# Altium PCB PCB1.PcbDoc
Units mm, origin at the board's own origin, x right, y up, seen from the top; angles counter-clockwise.
Board outline 85.98 x 15 mm, 2 copper layers (Top Layer, Bottom Layer); 48 components, 48 nets, 104 pads, 9 vias.
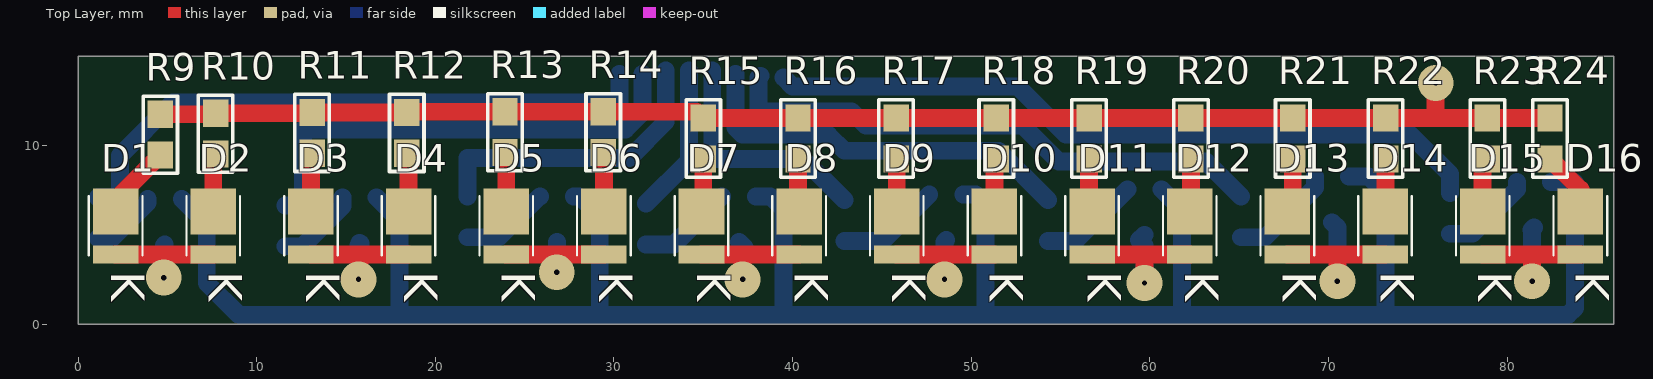
[diagram p0: Top Layer view]
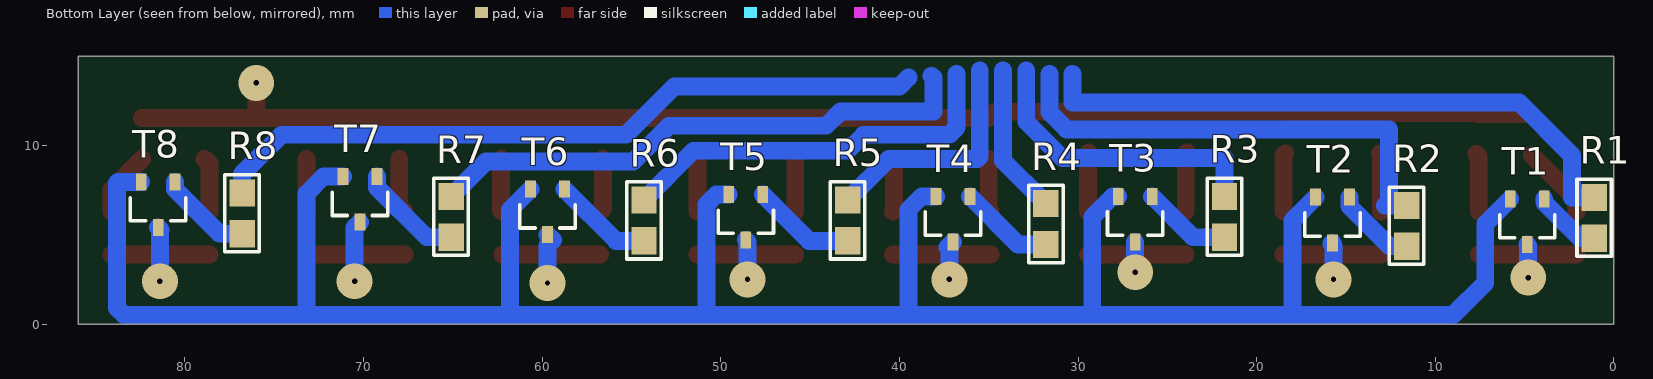
[diagram p1: Bottom Layer view, seen from below]
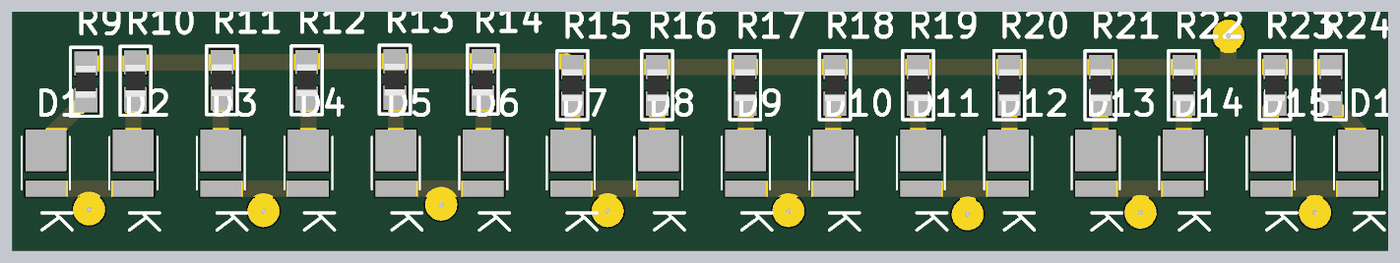
[diagram p2: 3D render of the assembled board from above, using the file's embedded part models]
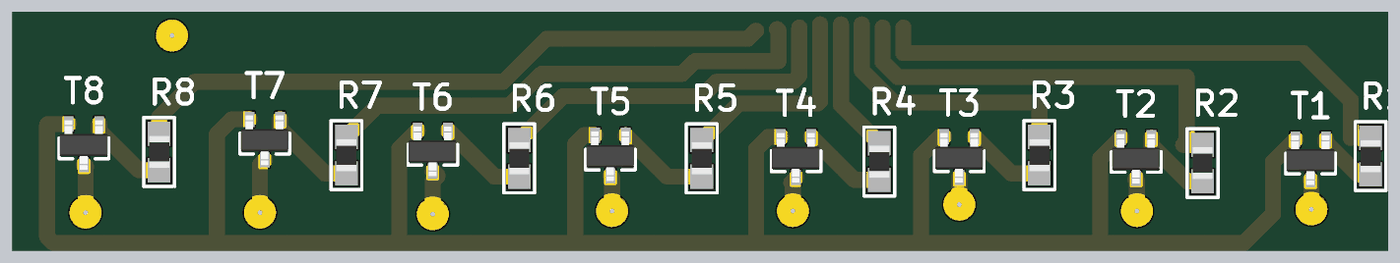
[diagram p3: 3D render of the assembled board from below, using the file's embedded part models]

## Layer stack, top to bottom
Top Solder: solder mask 0.0102, Solder Resist, Dk 3.5
Top Layer: signal copper 0.0356
Dielectric 1: dielectric 0.32, FR-4, Dk 4.8
Bottom Layer: signal copper 0.0356
Bottom Solder: solder mask 0.0102, Solder Resist, Dk 3.5

## Board outline
0,0 85.979,0 85.979,14.986 0.014,14.986 0,15

## Design rules (kind name [scope] priority, off if disabled: settings)
Clearance [All] p1: gap=0.3 ignorepadtopadclearanceinfootprint=FALSE
PolygonConnect [All] p1: connectstyle=Relief reliefconductorwidth=0.254 reliefentries=4 polygonreliefangle="90 Angle" airgapwidth=0.254
RoutingVias [All] p1: holewidth=0.711 width=1.27 viastyle="Through Hole" minholewidth=0.711 minwidth=1.27 maxholewidth=0.711 maxwidth=1.27
SolderMaskExpansion [All] p1: expansion=0.102
Width [All] p1: maxlimit=1 minlimit=0.5 preferedwidth=1
30 further rules are at their usual default settings.

## Components (designator, comment, footprint, x,y, rotation, side; value= is the part's Value field where it differs from the comment)
D1 "LED" *LED_OF-SMD2835Y 2.1,5.5 r270 top
D2 "LED" *LED_OF-SMD2835Y 7.567,5.5 r270 top
D3 "LED" *LED_OF-SMD2835Y 13.033,5.5 r270 top
D4 "LED" *LED_OF-SMD2835Y 18.5,5.5 r270 top
D5 "LED" *LED_OF-SMD2835Y 23.967,5.5 r270 top
D6 "LED" *LED_OF-SMD2835Y 29.433,5.5 r270 top
D7 "LED" *LED_OF-SMD2835Y 34.9,5.5 r270 top
D8 "LED" *LED_OF-SMD2835Y 40.367,5.5 r270 top
D9 "LED" *LED_OF-SMD2835Y 45.833,5.5 r270 top
D10 "LED" *LED_OF-SMD2835Y 51.3,5.5 r270 top
D11 "LED" *LED_OF-SMD2835Y 56.767,5.5 r270 top
D12 "LED" *LED_OF-SMD2835Y 62.233,5.5 r270 top
D13 "LED" *LED_OF-SMD2835Y 67.7,5.5 r270 top
D14 "LED" *LED_OF-SMD2835Y 73.167,5.5 r270 top
D15 "LED" *LED_OF-SMD2835Y 78.633,5.5 r270 top
D16 "LED" *LED_OF-SMD2835Y 84.1,5.5 r270 top
R1 "100" 0805 1.1,5.943 r270 bottom
R2 "100" 0805 11.6,5.5 r270 bottom
R3 "100" 0805 21.8,6 r270 bottom
R4 "100" 0805 31.8,5.6 r270 bottom
R5 "100" 0805 42.9,5.8 r270 bottom
R6 "100" 0805 54.3,5.8 r270 bottom
R7 "100" 0805 65.1,6 r270 bottom
R8 "100" 0805 76.8,6.2 r270 bottom
R9 "68" 0805 4.6,10.6 r90 top
R10 "68" 0805 7.7,10.657 r90 top
R11 "68" 0805 13.1,10.7 r90 top
R12 "68" 0805 18.4,10.7 r90 top
R13 "68" 0805 23.9,10.743 r90 top
R14 "68" 0805 29.4,10.743 r90 top
R15 "68" 0805 35,10.388 r90 top
R16 "68" 0805 40.3,10.388 r90 top
R17 "68" 0805 45.8,10.388 r90 top
R18 "68" 0805 51.4,10.388 r90 top
R19 "68" 0805 56.6,10.388 r90 top
R20 "68" 0805 62.3,10.388 r90 top
R21 "68" 0805 68,10.388 r90 top
R22 "68" 0805 73.2,10.388 r90 top
R23 "68" 0805 78.9,10.388 r90 top
R24 "68" 0805 82.4,10.388 r90 top
T1 "BC817-25" SOT23 3.9,7 r0 bottom
T2 "BC817-25" SOT23 14.8,7.1 r0 bottom
T3 "BC817-25" SOT23 25.85,7.15 r0 bottom
T4 "BC817-25" SOT23 36.05,7.15 r0 bottom
T5 "BC817-25" SOT23 47.65,7.25 r0 bottom
T6 "BC817-25" SOT23 58.75,7.55 r0 bottom
T7 "BC817-25" SOT23 69.25,8.25 r0 bottom
T8 "BC817-25" SOT23 80.55,7.95 r0 bottom

## Footprints (in the part's own frame and the unit in brackets; to place one, negate y for a bottom-side part, rotate by r counter-clockwise, add the part's x,y. Pads: shape width x height; smd on the part's side, far side on the other; paste and mask are expansions set on the pad)
0805 [mil] "Pasivo 0805"
  rect 60x56 smd: 1(-45,0) 2(45,0)
  silkscreen extent -85,-38 85,38, body extent -40,-25 39,25, height 15
*LED_OF-SMD2835Y [mm]
  rect 2.6x2.55 smd: 1(-0.8,0)
  rect 1x2.55 smd: 2(1.6,0)
  silkscreen extent -1.65,-1.5 1.65,1.5
SOT23 [mm]
  rect 0.6x0.95 smd: 1(0,0) 2(0.95,2.55) 3(1.9,0)
  silkscreen extent -0.6,0.87 2.5,2.17, body extent -0.53,-0.25 2.47,2.88, height 1

## Part data
R1 R2 R3 R4 R5 R6 R7 R8 R9 R10 R11 R12 R13 R14 R15 R16 R17 R18 R19 R20 R21 R22 R23 R24: library part RES
T1 T2 T3 T4 T5 T6 T7 T8: library part "TRANSISTOR NPN"

## Via types
v1: diameter 2, hole 0.3, Top Layer to Bottom Layer, 9 vias

## Nets (pads, with @x,y where several pads share a name; then routed paths per layer and width w, separated by ;. In a path a pad name is that pad's centre, name@x,y a point inside that pad or via, vN(x,y) a via of type N, cw(c..) or ccw(c..) an arc to the next point about the centre after c; other vN are vias at no path point)
clockL: 
clockSR: 
dataIn: 
GND: T1.3 T2.3 T3.3 T4.3 T5.3 T6.3 T7.3 T8.3 | length 138.1
  Bottom Layer w1: T1.3 7.2,5.6 7.2,2.3 9,0.5 18.2,0.5 ; T2.3 18,5.8 18,0.7 18.2,0.5 ; T3.3 28.05,7.15 29.2,6 29.2,0.5 ; T4.3 38.75,7.15 39.5,6.4 39.5,0.5 ; T5.3 50.25,7.25 50.8,6.7 50.8,0.5 ; T6.3 61.8,6.4 61.8,0.6 61.9,0.5 ; T7.3 72.25,8.25 73.2,7.3 73.2,0.5 ; T8.3 83.75,7.95 83.8,7.9 83.8,0.9 83.4,0.5 73.2,0.5 ; 18.2,0.5 29.2,0.5 ; 29.2,0.5 39.5,0.5 ; 39.5,0.5 50.8,0.5 ; 50.8,0.5 61.9,0.5 ; 61.9,0.5 73.2,0.5
NetD1_1: D1.1 R9.1 | length 4.2
  Top Layer w1: D1.1 2.1,6.957 R9.1
NetD1_2: D1.2 D2.2 T1.2 | length 8.7
  Top Layer w1: D1.2 4.833,3.9 ; v1(4.8,2.6) 4.8,3.867 4.833,3.9 ; D2.2 4.833,3.9
  Bottom Layer w1: v1(4.8,2.6) 4.8,4.4 T1.2
NetD2_1: D2.1 R10.1 | length 3.3
  Top Layer w1: D2.1 7.567,9.381 R10.1
NetD3_1: D3.1 R11.1 | length 3.3
  Top Layer w1: D3.1 13.033,9.49 R11.1
NetD3_2: D3.2 D4.2 T2.2 | length 8.9
  Top Layer w1: D3.2 15.767,3.9 ; v1@15.767,2.6 15.767,3.9 ; D4.2 15.767,3.9
  Bottom Layer w1: v1(15.7,2.5) 15.7,4.4 15.8,4.5 T2.2
NetD4_1: D4.1 R12.1 | length 3.3
  Top Layer w1: R12.1 18.5,9.457 D4.1
NetD5_1: D5.1 R13.1 | length 3.3
  Top Layer w1: R13.1 23.967,9.533 D5.1
NetD5_2: D5.2 D6.2 T3.2 | length 8.2
  Top Layer w1: D5.2 26.8,3.9 ; v1(26.8,2.9) 26.8,3.9 ; D6.2 26.8,3.9
  Bottom Layer w1: v1(26.8,2.9) T3.2
NetD6_1: D6.1 R14.1 | length 3.3
  Top Layer w1: R14.1 29.433,9.567 D6.1
NetD7_1: D7.1 R15.1 | length 3
  Top Layer w1: D7.1 35,6.4 R15.1
NetD7_2: D7.2 D8.2 T4.2 | length 9.2
  Top Layer w1: D7.2 37.3,3.9 ; v1(37.2,2.5) 37.2,3.8 37.3,3.9 ; D8.2 37.3,3.9
  Bottom Layer w1: T4.2 37.3,4.3 37.2,4.2 v1(37.2,2.5)
NetD8_1: D8.1 R16.1 | length 3
  Top Layer w1: R16.1 40.3,6.367 D8.1
NetD9_1: D9.1 R17.1 | length 3
  Top Layer w1: R17.1 45.833,9.212 D9.1
NetD9_2: D9.2 D10.2 T5.2 | length 9.1
  Top Layer w1: D9.2 48.5,3.9 ; v1(48.5,2.5) 48.5,3.9 ; D10.2 48.5,3.9
  Bottom Layer w1: v1(48.5,2.5) 48.5,4.6 T5.2
NetD10_1: D10.1 R18.1 | length 3
  Top Layer w1: D10.1 51.3,9.145 R18.1
NetD11_1: D11.1 R19.1 | length 3
  Top Layer w1: R19.1 56.6,6.467 D11.1
NetD11_2: D11.2 D12.2 T6.2 | length 10.1
  Top Layer w1: D11.2 59.4,3.9 ; v1(59.7,2.3) 59.7,3.6 59.4,3.9 ; D12.2 59.4,3.9
  Bottom Layer w1: v1(59.7,2.3) 59.7,4.4 59.4,4.7 T6.2
NetD12_1: D12.1 R20.1 | length 3
  Top Layer w1: D12.1 62.3,6.367 R20.1
NetD13_1: D13.1 R21.1 | length 3.1
  Top Layer w1: D13.1 68,6.6 R21.1
NetD13_2: D13.2 D14.2 T7.2 | length 10.4
  Top Layer w1: D13.2 70.4,3.9 ; v1(70.5,2.4) 70.5,3.8 70.4,3.9 ; D14.2 70.4,3.9
  Bottom Layer w1: T7.2 70.5,5.4 v1(70.5,2.4)
NetD14_1: D14.1 R22.1 | length 3
  Top Layer w1: D14.1 73.2,6.333 R22.1
NetD15_1: D15.1 R23.1 | length 3.1
  Top Layer w1: D15.1 78.633,8.979 R23.1
NetD15_2: D15.2 D16.2 T8.2 | length 10
  Top Layer w1: D15.2 81.367,3.9 ; v1(81.4,2.4) 81.4,3.867 81.367,3.9 ; D16.2 81.367,3.9
  Bottom Layer w1: v1(81.4,2.4) 81.4,5.233 81.367,5.267 T8.2
NetD16_1: D16.1 R24.1 | length 3.6
  Top Layer w1: R24.1 84.1,7.545 D16.1
NetR1_2: R1.2 T1.1 | length 3.8
  Bottom Layer w1: R1.2 1.9,4.8 3.9,6.8 T1.1
NetR2_2: R2.2 T2.1 | length 4.6
  Bottom Layer w1: R2.2 12.557,4.357 14.8,6.6 T2.1
NetR3_2: R3.2 T3.1 | length 5
  Bottom Layer w1: R3.2 23.557,4.857 T3.1
NetR4_2: R4.2 T4.1 | length 5.4
  Bottom Layer w1: R4.2 33.357,4.457 T4.1
NetR5_2: R5.2 T5.1 | length 5.8
  Bottom Layer w1: R5.2 45.057,4.657 T5.1
NetR6_2: R6.2 T6.1 | length 5.6
  Bottom Layer w1: R6.2 55.857,4.657 T6.1
NetR7_2: R7.2 T7.1 | length 5.9
  Bottom Layer w1: R7.2 66.457,4.857 69.25,7.65 T7.1
NetR8_2: R8.2 T8.1 | length 5.2
  Bottom Layer w1: R8.2 78.057,5.057 80.55,7.55 T8.1
o0: R1.1 | length 34.4
  Bottom Layer w1: R1.1 2.342,7.086 2.342,9.442 5.3,12.4 30.3,12.4 30.3,14
o1: R2.1 | length 27.1
  Bottom Layer w1: R2.1 12.811,6.643 12.6,6.854 12.6,10.9 30.638,10.9 31.6,11.862 31.6,14
o2: R3.1 | length 17
  Bottom Layer w1: R3.1 21.8,9.3 30.877,9.3 32.9,11.323 32.9,14.2
o3: R4.1 | length 8.5
  Bottom Layer w1: R4.1 34.2,9.143 34.2,14.2
o4: R5.1 | length 13.2
  Bottom Layer w1: 35.5,14.2 35.5,9.386 35.643,9.243 40.6,9.243 R5.1
o5: R6.1 | length 22.2
  Bottom Layer w1: 36.8,14 36.8,11 37.2,10.6 42,10.6 42.9,9.7 51.543,9.7 R6.1
o6: R7.1 | length 31
  Bottom Layer w1: 38.2,13.9 38.1,13.8 38.1,11.9 43.3,11.9 44.1,11.1 52.9,11.1 54.9,9.1 63.143,9.1 R7.1
o7: R8.1 | length 40.6
  Bottom Layer w1: 39.5,13.8 40,13.3 52.6,13.3 55.3,10.6 74.6,10.6 76.8,8.4 R8.1
PB3: 
PB4: 
PB5: 
VCC: R9.2 R10.2 R11.2 R12.2 R13.2 R14.2 R15.2 R16.2 R17.2 R18.2 R19.2 R20.2 R21.2 R22.2 R23.2 R24.2 | length 80.1
  Top Layer w1: R9.2 7.643,11.743 R10.2 13.057,11.8 R11.2 R12.2 18.443,11.886 R13.2 R14.2 34.645,11.886 R15.2 R16.2 R17.2 R18.2 R19.2 R20.2 R21.2 R22.2 75.7,11.531 ; v1(76,13.5) 76,11.831 75.7,11.531 ; R24.2 R23.2 75.7,11.531

## Text inside footprints (layer, text, board x,y; h text height)
D1: Top Overlay "K" at 1.85,2.959 h1.88 r270
D2: Top Overlay "K" at 7.317,2.959 h1.88 r270
D3: Top Overlay "K" at 12.783,2.959 h1.88 r270
D4: Top Overlay "K" at 18.25,2.959 h1.88 r270
D5: Top Overlay "K" at 23.717,2.959 h1.88 r270
D6: Top Overlay "K" at 29.183,2.959 h1.88 r270
D7: Top Overlay "K" at 34.65,2.959 h1.88 r270
D8: Top Overlay "K" at 40.117,2.959 h1.88 r270
D9: Top Overlay "K" at 45.583,2.959 h1.88 r270
D10: Top Overlay "K" at 51.05,2.959 h1.88 r270
D11: Top Overlay "K" at 56.517,2.959 h1.88 r270
D12: Top Overlay "K" at 61.983,2.959 h1.88 r270
D13: Top Overlay "K" at 67.45,2.959 h1.88 r270
D14: Top Overlay "K" at 72.917,2.959 h1.88 r270
D15: Top Overlay "K" at 78.383,2.959 h1.88 r270
D16: Top Overlay "K" at 83.85,2.959 h1.88 r270